# EAGLE board 16*Vibrationdriver_PCA9685 (EAGLE 7.2.0)
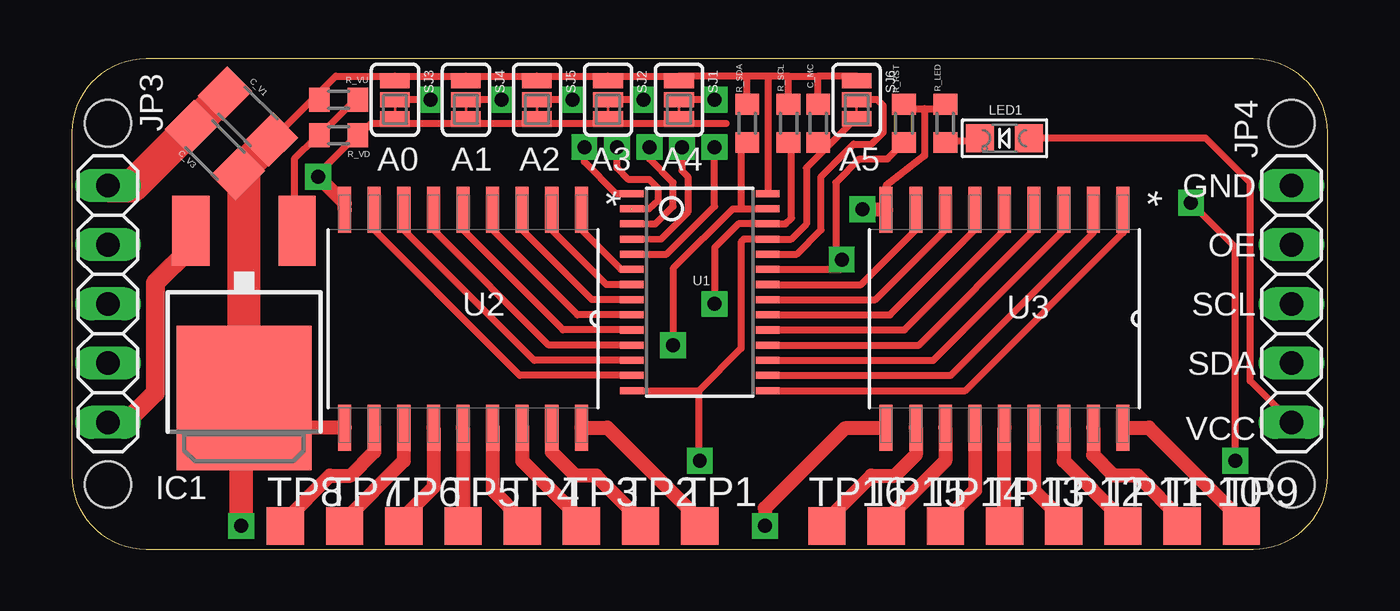
[diagram p0: board, top side]
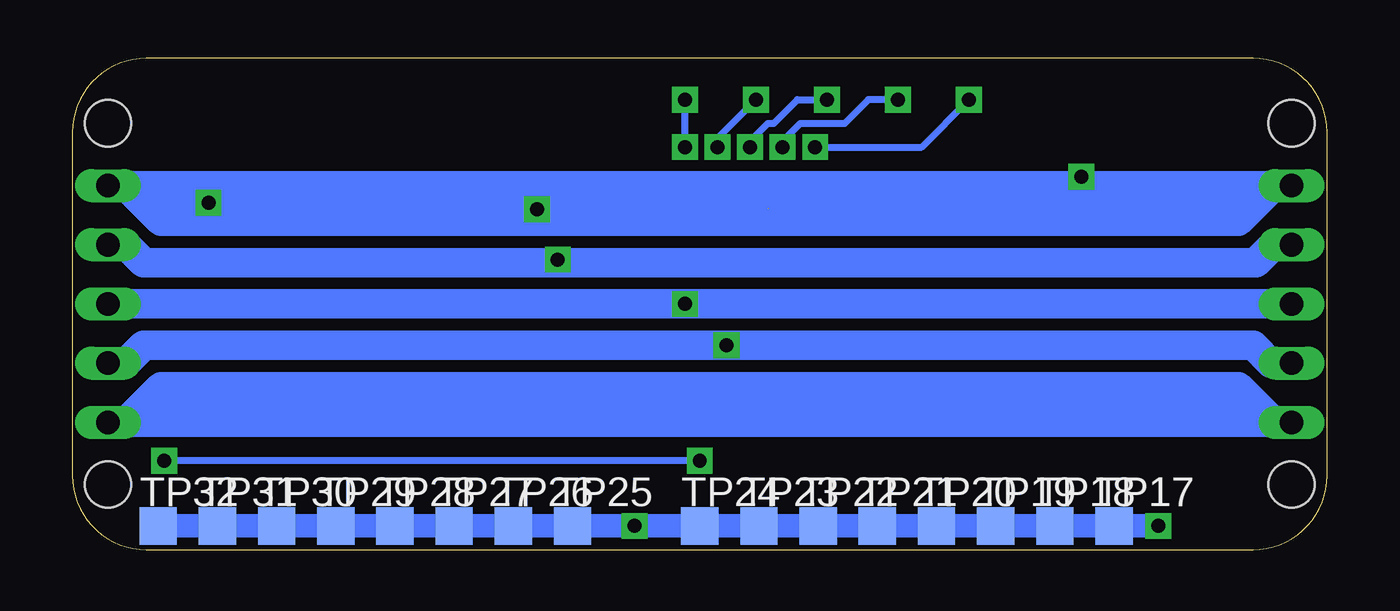
[diagram p1: board, bottom side, seen from below]

Size 53.85 x 21.08 mm. Coordinates in mm from the lower left corner, seen from the top.
Outline: 3.17,0 arc-90 0,3.17 0,17.91 arc-90 3.17,21.08 50.67,21.08 arc-90 53.85,17.91 53.85,3.17 arc-90 50.67,0 3.17,0
Copper layers (1*16): Top 0.035mm / dielectric 1.5mm / Bottom 0.035mm
Design rules "PCBCart-Standard": minimum track width 8mil, minimum drill 0.4mm, track to track 8mil, track to pad 8mil, pad to pad 8mil, via to via 8mil, smd to smd 8mil, copper to edge 20mil, drill to drill 8mil, minimum pad ring 8mil, minimum via ring 10mil, stop-mask expansion 3mil, vias tented up to drill 20mil, thermal gap 8mil
Holes 2 mm at 1.52,18.29 52.32,18.29 52.32,2.79 1.52,2.79

## Footprints (pad centres in the part's own frame; a part is rotated, then mirrored left to right if it is on the bottom)
603 = smd 0.889 x 1.016: 1 -0.826,0; 2 0.826,0
1206 = smd 1.524 x 1.778: 1 -1.397,0; 2 1.397,0
DPACK = smd 1.6 x 3: 1 -2.28,-4.8; 3 2.28,-4.8 | smd 5.8 x 6.2: 4 0,2.38
1X05 = drill 1.016 long: 1 -5.08,0; 2 -2.54,0; 3 0,0; 4 2.54,0; 5 5.08,0
CHIPLED_0805 = smd 1.2 x 1.2: A 0,-1.05; C 0,1.05
SJ_3_PASTE2&3 = smd 0.635 x 1.27: 1 -0.813,0; 2 0,0; 3 0.813,0
TP16SQ = smd 1.6 x 1.6: TP 0,0
TSSOP28 = smd 0.305 x 0.991: 1 -4.225,-2.918; 2 -3.575,-2.918; 3 -2.925,-2.918; 4 -2.275,-2.918; 5 -1.625,-2.918; 6 -0.975,-2.918; 7 -0.325,-2.918; 8 0.325,-2.918; 9 0.975,-2.918; 10 1.625,-2.918; 11 2.275,-2.918; 12 2.925,-2.918; 13 3.575,-2.918; 14 4.225,-2.918; 15 4.225,2.918; 16 3.575,2.918; 17 2.925,2.918; 18 2.275,2.918; 19 1.625,2.918; 20 0.975,2.918; 21 0.325,2.918; 22 -0.325,2.918; 23 -0.975,2.918; 24 -1.625,2.918; 25 -2.275,2.918; 26 -2.925,2.918; 27 -3.575,2.918; 28 -4.225,2.918
SOIC127P1030X265-18N = smd 1.981 x 0.559: 1 -4.674,5.08; 2 -4.674,3.81; 3 -4.674,2.54; 4 -4.674,1.27; 5 -4.674,0; 6 -4.674,-1.27; 7 -4.674,-2.54; 8 -4.674,-3.81; 9 -4.674,-5.08; 10 4.674,-5.08; 11 4.674,-3.81; 12 4.674,-2.54; 13 4.674,-1.27; 14 4.674,0; 15 4.674,1.27; 16 4.674,2.54; 17 4.674,3.81; 18 4.674,5.08

## Placement (x,y rotation side)
C_MC  10µ  [603]  32,18.29 90 top
C_V1  100µ  [1206]  7.53,18.58 315 top
C_V3  100µ  [1206]  6.12,17.14 315 top
IC1  LM317MDTRKG  [DPACK]  7.37,8.89 180 top
JP3  [1X05]  1.52,10.54 90 top
JP4  [1X05]  52.32,10.54 90 top
LED1  VCC  [CHIPLED_0805]  40.01,17.65 90 top
R_LED  220  [603]  37.47,18.29 90 top
R_RST  10k  [603]  35.69,18.29 90 top
R_SCL  10k  [603]  30.73,18.29 90 top
R_SDA  10k  [603]  28.96,18.29 90 top
R_VD  5k?  [603]  11.43,17.78 180 top
R_VU  121?  [603]  11.43,19.3 0 top
SJ1  [SJ_3_PASTE2&3]  26.04,19.3 270 top
SJ2  [SJ_3_PASTE2&3]  22.99,19.3 270 top
SJ3  [SJ_3_PASTE2&3]  13.84,19.3 270 top
SJ4  [SJ_3_PASTE2&3]  16.89,19.3 270 top
SJ5  [SJ_3_PASTE2&3]  19.94,19.3 270 top
SJ6  [SJ_3_PASTE2&3]  33.66,19.3 270 top
TP1  TPTP16SQ  [TP16SQ]  26.92,1.02 0 top
TP2  TPTP16SQ  [TP16SQ]  24.38,1.02 0 top
TP3  TPTP16SQ  [TP16SQ]  21.84,1.02 0 top
TP4  TPTP16SQ  [TP16SQ]  19.3,1.02 0 top
TP5  TPTP16SQ  [TP16SQ]  16.76,1.02 0 top
TP6  TPTP16SQ  [TP16SQ]  14.22,1.02 0 top
TP7  TPTP16SQ  [TP16SQ]  11.68,1.02 0 top
TP8  TPTP16SQ  [TP16SQ]  9.14,1.02 0 top
TP9  TPTP16SQ  [TP16SQ]  50.16,1.02 0 top
TP10  TPTP16SQ  [TP16SQ]  47.62,1.02 0 top
TP11  TPTP16SQ  [TP16SQ]  45.09,1.02 0 top
TP12  TPTP16SQ  [TP16SQ]  42.55,1.02 0 top
TP13  TPTP16SQ  [TP16SQ]  40.01,1.02 0 top
TP14  TPTP16SQ  [TP16SQ]  37.47,1.02 0 top
TP15  TPTP16SQ  [TP16SQ]  34.93,1.02 0 top
TP16  TPTP16SQ  [TP16SQ]  32.38,1.02 0 top
TP17  TPTP16SQ  [TP16SQ]  9.14,1.02 0 bottom
TP18  TPTP16SQ  [TP16SQ]  11.68,1.02 0 bottom
TP19  TPTP16SQ  [TP16SQ]  14.22,1.02 0 bottom
TP20  TPTP16SQ  [TP16SQ]  16.76,1.02 0 bottom
TP21  TPTP16SQ  [TP16SQ]  19.3,1.02 0 bottom
TP22  TPTP16SQ  [TP16SQ]  21.84,1.02 0 bottom
TP23  TPTP16SQ  [TP16SQ]  24.38,1.02 0 bottom
TP24  TPTP16SQ  [TP16SQ]  26.92,1.02 0 bottom
TP25  TPTP16SQ  [TP16SQ]  32.38,1.02 0 bottom
TP26  TPTP16SQ  [TP16SQ]  34.93,1.02 0 bottom
TP27  TPTP16SQ  [TP16SQ]  37.47,1.02 0 bottom
TP28  TPTP16SQ  [TP16SQ]  40.01,1.02 0 bottom
TP29  TPTP16SQ  [TP16SQ]  42.55,1.02 0 bottom
TP30  TPTP16SQ  [TP16SQ]  45.09,1.02 0 bottom
TP31  TPTP16SQ  [TP16SQ]  47.62,1.02 0 bottom
TP32  TPTP16SQ  [TP16SQ]  50.16,1.02 0 bottom
U1  PCA9685  [TSSOP28]  26.92,11.05 270 top
U2  ULN2803ADWR  [SOIC127P1030X265-18N]  16.76,9.91 270 top
U3  ULN2803ADWR  [SOIC127P1030X265-18N]  40.01,9.91 270 top

## Library data of the parts
C_MC C_V1 C_V3 R_LED R_RST R_SCL R_SDA R_VD R_VU = thar
IC1 = v-reg
JP3 JP4 = pinhead
LED1 U1 = microbuilder
SJ1-SJ6 = SparkFun-Retired
TP1-TP32 = testpad
U2 U3 = TI_ULN2803; MPN: ULN2803ADWR; OC_FARNELL: 1652420; OC_NEWARK: 87H4769; PACKAGE: SOIC-18; SUPPLIER: TEXAS INSTRUMENTS

## Nets
+3V3: C_MC.2 C_V1.2 C_V3.2 IC1.4 R_SCL.2 R_SDA.2 R_VU.1 SJ1.1 SJ2.1 SJ3.1 SJ4.1 SJ5.1 SJ6.1 TP17.TP TP18.TP TP19.TP TP20.TP TP21.TP TP22.TP TP23.TP TP24.TP TP25.TP TP26.TP TP27.TP TP28.TP TP29.TP TP30.TP TP31.TP TP32.TP U1.28 U2.10 U3.10
GND: C_MC.1 C_V1.1 C_V3.1 JP3.5 JP4.5 R_LED.2 R_RST.2 R_VD.1 SJ1.2 SJ1.3 SJ2.2 SJ2.3 SJ3.2 SJ3.3 SJ4.2 SJ4.3 SJ5.2 SJ5.3 SJ6.2 SJ6.3 U1.1 U1.2 U1.3 U1.4 U1.5 U1.14 U1.24 U1.25 U2.9 U3.9
N$1: LED1.C R_LED.1
N$14: TP1.TP U2.18
N$18: IC1.1 R_VD.2 R_VU.2
N$19: TP2.TP U2.17
N$20: TP3.TP U2.16
N$21: TP4.TP U2.15
N$22: TP5.TP U2.14
N$23: TP6.TP U2.13
N$24: TP7.TP U2.12
N$25: TP8.TP U2.11
N$26: TP9.TP U3.18
N$27: TP10.TP U3.17
N$28: TP11.TP U3.16
N$29: TP12.TP U3.15
N$30: TP13.TP U3.14
N$31: TP14.TP U3.13
N$32: TP15.TP U3.12
N$33: TP16.TP U3.11
OE: JP3.4 JP4.4 R_RST.1 U1.23
PWM0: U1.6 U2.1
PWM1: U1.7 U2.2
PWM2: U1.8 U2.3
PWM3: U1.9 U2.4
PWM4: U1.10 U2.5
PWM5: U1.11 U2.6
PWM6: U1.12 U2.7
PWM7: U1.13 U2.8
PWM8: U1.15 U3.1
PWM9: U1.16 U3.2
PWM10: U1.17 U3.3
PWM11: U1.18 U3.4
PWM12: U1.19 U3.5
PWM13: U1.20 U3.6
PWM14: U1.21 U3.7
PWM15: U1.22 U3.8
SCL: JP3.3 JP4.3 R_SCL.1 U1.26
SDA: JP3.2 JP4.2 R_SDA.1 U1.27
VCC: IC1.3 JP3.1 JP4.1 LED1.A

## Tracks (layer width: path | path; a pad name or v marks a point on that pad's centre or on a via)
+3V3  (via drill 0.6)
  Top 0.305: 34.9,5.21 U3.10 | 30.73,20.32 32,20.32 | C_MC.2 32,20.32 | R_SDA.2 28.96,20.32 | 32,20.32 33.66,20.32 SJ6.1 | 30.73,20.32 29.97,20.32 | 29.97,20.32 28.96,20.32 | C_V1.2 8.57,17.59 10.48,19.5 | 10.48,19.5 11.3,20.32 13.84,20.32 | SJ3.1 13.84,20.32 | R_VU.1 10.61,19.37 10.48,19.5 | 13.84,20.32 16.89,20.32 | 16.89,20.32 19.94,20.32 | 19.94,20.32 22.99,20.32 | SJ4.1 16.89,20.32 | SJ5.1 19.94,20.32 | SJ2.1 22.99,20.32 | 22.99,20.32 26.04,20.32 | SJ1.1 26.04,20.32 | R_SCL.2 30.73,20.32 | 28.96,20.32 26.04,20.32 | 29.97,20.32 29.84,20.32 U1.28 | U2.10 7.34,5.23 7.24,5.33
  Top 0.61: U2.10 6.76,5.23 6.6,5.08 | 34.9,5.21 33.15,5.21 29.72,1.78 v29.72,1.02
  Top 1.016: 7.24,5.33 v7.24,1.02
  Top 1.27: IC1.4 6.95,6.76 6.86,7.62 6.86,6.35 7.11,6.6
  Top 1.422: 7.11,6.6 6.6,5.08 | C_V1.2 8.3,17.36 | 8.3,17.36 C_V3.2 | IC1.4 7.37,16.42 8.3,17.36
  Bottom 1.016: TP18.TP TP17.TP v7.24,1.02 | TP32.TP TP31.TP TP30.TP TP29.TP TP28.TP TP27.TP TP26.TP TP25.TP v29.72,1.02 TP24.TP TP23.TP TP22.TP TP21.TP TP20.TP TP19.TP TP18.TP | TP18.TP 11.81,0.89 | 11.43,1.27 TP18.TP
GND  (via drill 0.6)  (1 unrouted)
  Top 0.1: SJ1.2 SJ1.3 | SJ2.2 SJ2.3 | SJ5.2 SJ5.3 | SJ3.2 SJ3.3 | SJ4.2 SJ4.3 | SJ6.2 SJ6.3
  Top 0.305: U1.14 26.86,6.82 | 26.86,6.82 26.89,6.82 28.7,8.64 28.7,13.21 28.82,13.32 U1.25 30.85,13.32 31.5,13.97 31.5,16.38 32.58,17.46 | v10.54,16 10.54,16.13 12.19,17.78 R_VD.1 | 12.32,17.84 R_VD.1 | 13.84,18.29 12.83,18.29 12.32,17.78 R_VD.1 | 13.84,18.29 16.89,18.29 | 16.89,18.29 19.94,18.29 | 19.94,18.29 22.99,18.29 | SJ4.3 16.89,18.29 | SJ3.3 13.84,18.29 | SJ5.3 19.94,18.29 | SJ2.3 22.99,18.29 | 22.99,18.29 26.04,18.29 | 26.04,18.29 28.07,18.29 | SJ1.3 26.04,18.29 | C_MC.1 32.58,17.46 | SJ6.3 33.6,18.49 32.58,17.46 | 36.58,18.92 37.47,18.92 R_LED.2 | R_RST.2 36.07,18.92 36.58,18.92 | 36.58,18.92 36.58,16.89 34.93,15.62 U3.9 | U1.24 31.09,12.67 32.13,13.72 32.13,16 33.53,17.4 34.29,17.4 34.8,17.91 34.8,19.05 34.54,19.3 SJ6.2 | U1.5 25.5,12.67 27.56,14.73 v27.56,17.27 | v27.56,19.3 SJ1.2 | U1.4 25.28,13.34 26.42,14.48 26.42,16 26.16,16.26 v26.16,17.27 | v24.51,19.3 SJ2.2 | U1.3 25.02,13.97 25.78,14.73 25.78,15.75 24.77,16.76 v24.77,17.27 | v21.46,19.3 SJ5.2 | v18.42,19.3 SJ4.2 | 23.98,14.62 24.75,14.62 25.15,14.99 25.15,15.49 24.77,15.88 23.88,15.88 23.37,16.38 v23.37,17.27 | U1.1 23.33,15.27 21.97,16.64 v21.97,17.27 | v15.37,19.3 SJ3.2 | 26.86,6.82 26.86,3.87 v26.92,3.81 | v49.91,3.81 49.91,12.97 v48.01,14.88
  Top 0.61: v33.91,14.61 34.9,14.61 U3.9 | U2.9 11.68,14.86 v10.54,16
  Top 1.422: JP3.5 2.6,15.62 5.89,18.92 | 5.89,18.92 C_V1.1 | C_V3.1 5.89,18.92
  Bottom 0.305: v10.54,16 11.68,15.11 | 11.68,14.86 11.81,14.1 | v27.56,17.27 v27.56,19.3 | v26.16,17.27 26.16,17.65 v24.51,19.3 | v23.37,17.27 23.37,17.53 22.61,18.29 20.7,18.29 19.69,19.3 v18.42,19.3 | v24.77,17.27 24.77,17.53 24,18.29 23.75,18.29 22.73,19.3 v21.46,19.3 | v21.97,17.27 17.4,17.27 v15.37,19.3 | v26.92,3.81 v49.91,3.81 | v48.01,14.88 47.75,14.88
  Bottom 0.61: 37.72,15.88 38.23,15.62 | 36.07,15.62 34.42,14.99 34.54,14.86 34.67,14.73 v33.91,14.61
  Bottom 1.27: JP3.5 2.29,15.62 3.81,14.1 11.81,14.1 34.54,14.1 | 34.54,14.1 34.54,14.86 11.81,14.86 | 34.54,14.1 50.04,14.1 51.56,15.62 JP4.5 | 1.4,15.62 38.23,15.62 JP4.5 | JP4.5 50.8,15.62 50.04,14.86 v48.01,14.88 47.75,14.88 34.93,14.99 36.07,15.62 | 11.68,14.86 11.68,15.11 3.94,14.86 3.81,14.99
N$1
  Top 0.305: LED1.C 39.34,17.62 39.24,17.53 37.91,17.53 R_LED.1
N$14
  Top 0.61: TP1.TP 26.92,1.27 22.96,5.23 U2.18
N$18
  Top 0.305: IC1.1 9.91,13.7 10.16,14.08 9.52,14.08 9.52,16.76 10.41,17.65 10.48,17.65 R_VD.2 12.13,19.3 R_VU.2
N$19
  Top 0.61: TP2.TP 24.38,1.27 22.48,3.17 21.59,3.17 20.57,4.19 U2.17
N$20
  Top 0.61: TP3.TP 21.84,1.27 19.3,3.81 U2.16
N$21
  Top 0.61: TP4.TP 19.3,1.27 18.03,2.54 U2.15
N$22
  Top 0.61: U2.14 TP5.TP
N$23
  Top 0.61: TP6.TP 14.22,1.4 15.49,2.67 U2.13
N$24
  Top 0.61: TP7.TP 11.68,1.27 14.22,3.81 U2.12
N$25
  Top 0.61: TP8.TP 9.14,1.27 11.05,3.17 11.94,3.17 12.95,4.19 U2.11
N$26
  Top 0.61: TP9.TP 50.16,1.27 46.2,5.23 U3.18
N$27
  Top 0.61: TP10.TP 47.62,1.27 45.72,3.17 44.7,3.17 43.81,4.06 U3.17
N$28
  Top 0.61: TP11.TP 45.09,1.27 42.55,3.81 U3.16
N$29
  Top 0.61: TP12.TP 42.55,1.27 41.27,2.54 U3.15
N$30
  Top 0.61: TP13.TP U3.14
N$31
  Top 0.61: TP14.TP 37.47,1.27 38.73,2.54 U3.13
N$32
  Top 0.61: TP15.TP 34.93,1.27 37.47,3.81 U3.12
N$33
  Top 0.61: TP16.TP 32.38,1.27 34.29,3.17 35.31,3.17 36.2,4.06 U3.11
OE  (via drill 0.6)
  Top 0.305: U1.23 32.98,12.02 v33.02,12.45 | v33.02,12.45 33.02,12.32 32.89,12.45 v33.02,12.45 | v33.02,12.45 32.77,12.32 32.77,15.75 33.78,16.76 34.99,16.76 R_RST.1
  Bottom 0.305: 31.75,12.32 v33.02,12.45
  Bottom 1.27: JP3.4 2.29,13.08 3.05,12.32 31.75,12.32 50.8,12.32 51.56,13.08 JP4.4
PWM0
  Top 0.305: U1.6 23.54,12.02 21.84,13.72 U2.1
PWM1
  Top 0.305: U1.7 22.92,11.37 20.57,13.72 U2.2
PWM2
  Top 0.305: U1.8 22.3,10.72 19.3,13.72 U2.3
PWM3
  Top 0.305: U1.9 21.68,10.07 18.03,13.72 U2.4
PWM4
  Top 0.305: U1.10 21.06,9.42 16.76,13.72 U2.5
PWM5
  Top 0.305: U1.11 20.44,8.77 15.49,13.72 U2.6
PWM6
  Top 0.305: U1.12 19.82,8.12 14.22,13.72 U2.7
PWM7
  Top 0.305: U1.13 19.2,7.47 12.95,13.72 U2.8
PWM8
  Top 0.305: U3.1 45.09,13.59 38.32,6.82 U1.15
PWM9
  Top 0.305: U3.2 43.81,13.59 37.7,7.47 U1.16
PWM10
  Top 0.305: U3.3 42.55,13.72 36.95,8.12 U1.17
PWM11
  Top 0.305: U3.4 41.27,13.72 36.33,8.77 U1.18
PWM12
  Top 0.305: U1.19 35.71,9.42 40.01,13.72 U3.5
PWM13
  Top 0.305: U1.20 35.09,10.07 38.73,13.72 U3.6
PWM14
  Top 0.305: U1.21 34.47,10.72 37.47,13.72 U3.7
PWM15
  Top 0.305: U1.22 33.85,11.37 36.2,13.72 U3.8
SCL  (via drill 0.6)
  Top 0.305: v27.56,10.54 27.56,12.95 28.58,13.97 U1.26 30.61,13.97 30.86,14.22 30.86,17.46 R_SCL.1
  Bottom 1.27: JP3.3 v27.56,10.54 JP4.3
SDA  (via drill 0.6)
  Top 0.305: v25.78,8.76 25.78,12.07 28.34,14.62 28.7,14.62 | 28.7,14.62 U1.27 | R_SDA.1 28.7,17.46 28.7,14.62
  Bottom 1.27: JP4.2 51.56,8 50.8,8.76 v25.78,8.76 3.17,8.76 2.41,8 JP3.2
VCC
  Top 0.305: JP4.1 52.2,5.46 52.2,5.59 50.55,7.24 50.55,15.75 48.64,17.65 41.53,17.65 41.56,17.69 LED1.A
  Top 0.813: IC1.3 5.09,12.96 3.56,11.43 3.56,6.73 2.29,5.46 JP3.1
  Bottom 1.27: JP4.1 51.56,5.46 50.04,6.99 3.81,6.99 2.29,5.46 JP3.1 JP4.1 | JP4.1 50.67,5.46 49.78,6.35 3.94,6.35 3.81,6.22

## Text on the board
tPlace: A0 | A1 | A2 | A3 | A4 | A5 | GND | OE | SCL | SDA | VCC